# EAGLE board APRS module (EAGLE 6.4)

Size 69.52 x 69.84 mm. Coordinates in mm from the lower left corner, seen from the top.
Outline: 0,0 69.52,0 69.52,69.84 0,69.84 0,0
Copper layers (1*16): Top 0.0356mm / dielectric 1.5011mm / Bottom 0.0356mm
Design rules "OSHpark *": minimum track width 20mil, minimum drill 13mil, track to track 6mil, track to pad 6mil, pad to pad 6mil, via to via 6mil, smd to smd 6mil, copper to edge 15mil, drill to drill 6mil, minimum pad ring 7mil, minimum via ring 7mil, stop-mask expansion 4mil, vias tented up to drill 0mil, thermal gap 10mil
Net classes: 0 10: width 0.254 mm; 1 vcc: width 0.254 mm; 2 20: width 0.508 mm; 3 30: width 0.762 mm

## Footprints (pad centres in the part's own frame; a part is rotated, then mirrored left to right if it is on the bottom)
E2,5-5 = drill 0.813 pad 1.6: + -1.27,0 | drill 0.813 pad 1.6 octagon: - 1.27,0
VENUS638FLPX = drill 0.8 pad 1.676: 3.3V 3.81,16.51; CLK 13.97,16.51; CS 11.43,16.51; GND 1.27,16.51; GND2 3.81,1.27; MISO 16.51,16.51; MOSI 19.05,16.51; NAV 6.35,1.27; PPS 8.89,1.27; RX0 8.89,16.51; RX1 11.43,1.27; SCL 16.51,1.27; SDA 19.05,1.27; TX0 6.35,16.51; TX1 13.97,1.27; VBAT 1.27,1.27
SOT223 = smd 1.499 x 2.007: 1 -2.261,-3.15; 2 0.025,-3.15; 3 2.311,-3.15 | smd 3.81 x 2.007: 4 0,3.15
SOT23-5 = smd 0.69 x 0.99: 1 -0.95,-1.29; 2 0,-1.29; 3 0.95,-1.29; 4 0.95,1.3; 5 -0.95,1.3
05 = drill 0.813 pad 1.6 octagon: 1 -2.54,0; 2 2.54,0
1X12 = drill 1.016 pad 1.88: 1 0,0; 2 2.54,0; 3 5.08,0; 4 7.62,0; 5 10.16,0; 6 12.7,0; 7 15.24,0; 8 17.78,0; 9 20.32,0; 10 22.86,0; 11 25.4,0; 12 27.94,0
SMTSO-256-ET = drill 3.81 pad 6.198: P$1 0,0
HX1 = drill 0.8 square: 0V 25.4,-8.89; EN 20.32,-8.89; RFGND1 0,-8.89; RFGND2 5.08,-8.89; RFOUT 2.54,-8.89; TXD 27.94,-8.89; VCC 22.86,-8.89 | smd 0.813 x 1.676: BODYGND1 -1.905,8.255; BODYGND2 36.195,8.255
1X03 = drill 1.016 pad 1.88: 1 0,0; 2 2.54,0; 3 5.08,0
R1206 = smd 1.6 x 1.803: 1 -1.422,0; 2 1.422,0
B3F-10XX = drill 1.016 long: 1 -3.251,2.261; 2 3.251,2.261; 3 -3.251,-2.261; 4 3.251,-2.261
BU-SMA-V = drill 1.27: 1 0,0 | drill 1.778: 2 -2.55,2.55; 3 2.55,2.55; 4 2.55,-2.55; 5 -2.55,-2.55
W237-102 = drill 1.194 long: 1 -2.5,-1.27; 2 2.5,-1.27

## Placement (x,y rotation side)
C1  10uF  [E2,5-5]  31.75,60.96 0 top
C2  10uF  [E2,5-5]  25.4,60.96 0 top
GPS  VENUS638FLPX  [VENUS638FLPX]  50.8,22.86 90 top
IC2  REG1117  [SOT223]  58.42,54.61 180 top
IC3  ON M74VHC1GT125DT1G  [SOT23-5]  64.77,11.43 90 top
IC5  ON M74VHC1GT125DT1G  [SOT23-5]  64.77,17.78 90 top
J6  J5MM  [05]  58.42,13.97 90 top
J8  J5MM  [05]  54.61,13.97 90 top
JP1  [1X12]  21.59,67.31 0 top
JP2  M01-SMTSO-256-ET  [SMTSO-256-ET]  3.81,3.81 0 top
JP3  M01-SMTSO-256-ET  [SMTSO-256-ET]  66.04,3.81 0 top
JP4  [1X12]  20.32,2.54 0 top
JP5  M01-SMTSO-256-ET  [SMTSO-256-ET]  3.81,66.04 0 top
JP6  M01-SMTSO-256-ET  [SMTSO-256-ET]  66.04,66.04 0 top
LOGO1  OSHW-LOGOL  [OSHW-LOGO-L]  58.42,3.81 0 top
M2  HX1  [HX1]  19.05,48.26 270 top
POWERCONNECTION  [1X03]  66.04,38.1 90 top
R1  10K  [R1206]  8.89,55.88 90 top
R2  3.3K  [R1206]  5.08,55.88 90 top
S1  [B3F-10XX]  45.72,10.16 0 top
X1  BU-SMA-V  [BU-SMA-V]  5.08,12.7 0 top
X2  Vin  [W237-102]  13.97,63.5 180 top

## Library data of the parts
C1 C2 = rcl
GPS M2 = trackuino
IC2 = burr-brown; MPN: REG1117; OC_FARNELL: 1097566; OC_NEWARK: 14P6981
IC3 IC5 = 74xx-little-us
J6 J8 = jumper
JP1 JP4 = SparkFun
JP2 JP3 JP5 JP6 POWERCONNECTION = SparkFun-Connectors
LOGO1 = SparkFun-Aesthetics
R1 R2 = resistor
S1 = switch-omron
X1 = con-coax; OC_FARNELL: unknown; OC_NEWARK: unknown
X2 = con-wago-500; MPN: 237-102; OC_FARNELL: unknown; OC_NEWARK: 70K9898

## Nets
+3V3: C1.+ GPS.3.3V IC2.2 POWERCONNECTION.1
+5V: IC3.5 IC5.5 M2.VCC POWERCONNECTION.3
A0: JP4.8
A1: JP4.7
A2: JP4.6 R1.1 R2.2
A3: JP4.5
A6: JP4.4
A7: JP4.3
D2: JP1.8
D3: IC3.2 J6.1 JP1.7
D4: IC5.2 J8.1 JP1.6
D5: JP1.5
D6: JP1.4
D7: JP1.3
D8: JP1.2
D9: JP1.1
D10: JP4.12
EN-5V: IC5.4 J8.2 M2.EN
GND [vcc]: C1.- C2.- GPS.GND IC2.1 IC3.1 IC3.3 IC5.1 IC5.3 JP1.9 JP4.1 JP4.2 M2.0V M2.BODYGND1 M2.BODYGND2 M2.RFGND1 M2.RFGND2 POWERCONNECTION.2 R2.1 S1.1 S1.2 X1.2 X1.3 X1.4 X1.5 X2.2
MISO: JP4.10
MOSI: JP4.11
RESET: JP1.10 S1.3 S1.4
RFOUT [20]: M2.RFOUT X1.1
RX: GPS.TX0
RXI: JP1.11
SCK: JP4.9
TXD-5V: IC3.4 J6.2 M2.TXD
TXO: JP1.12
VIN [30]: C2.+ IC2.3 R1.2 X2.1

## Tracks (layer width: path | path; a pad name or v marks a point on that pad's centre or on a via)
+3V3  (3 unrouted)
+5V  (3 unrouted)
A2  (2 unrouted)
D3  (2 unrouted)
D4  (2 unrouted)
EN-5V  (2 unrouted)
GND  (24 unrouted)
RESET  (2 unrouted)
RFOUT  (1 unrouted)
TXD-5V  (2 unrouted)
VIN  (3 unrouted)